# Altium PCB Voltage Controller.PcbDoc
Units mm, origin at the board's own origin, x right, y up, seen from the top; angles counter-clockwise.
Board outline 45 x 50 mm, 2 copper layers (Top Layer, Bottom Layer), stack 0.98 mm thick; 19 components, 11 nets, 42 pads, 0 vias.
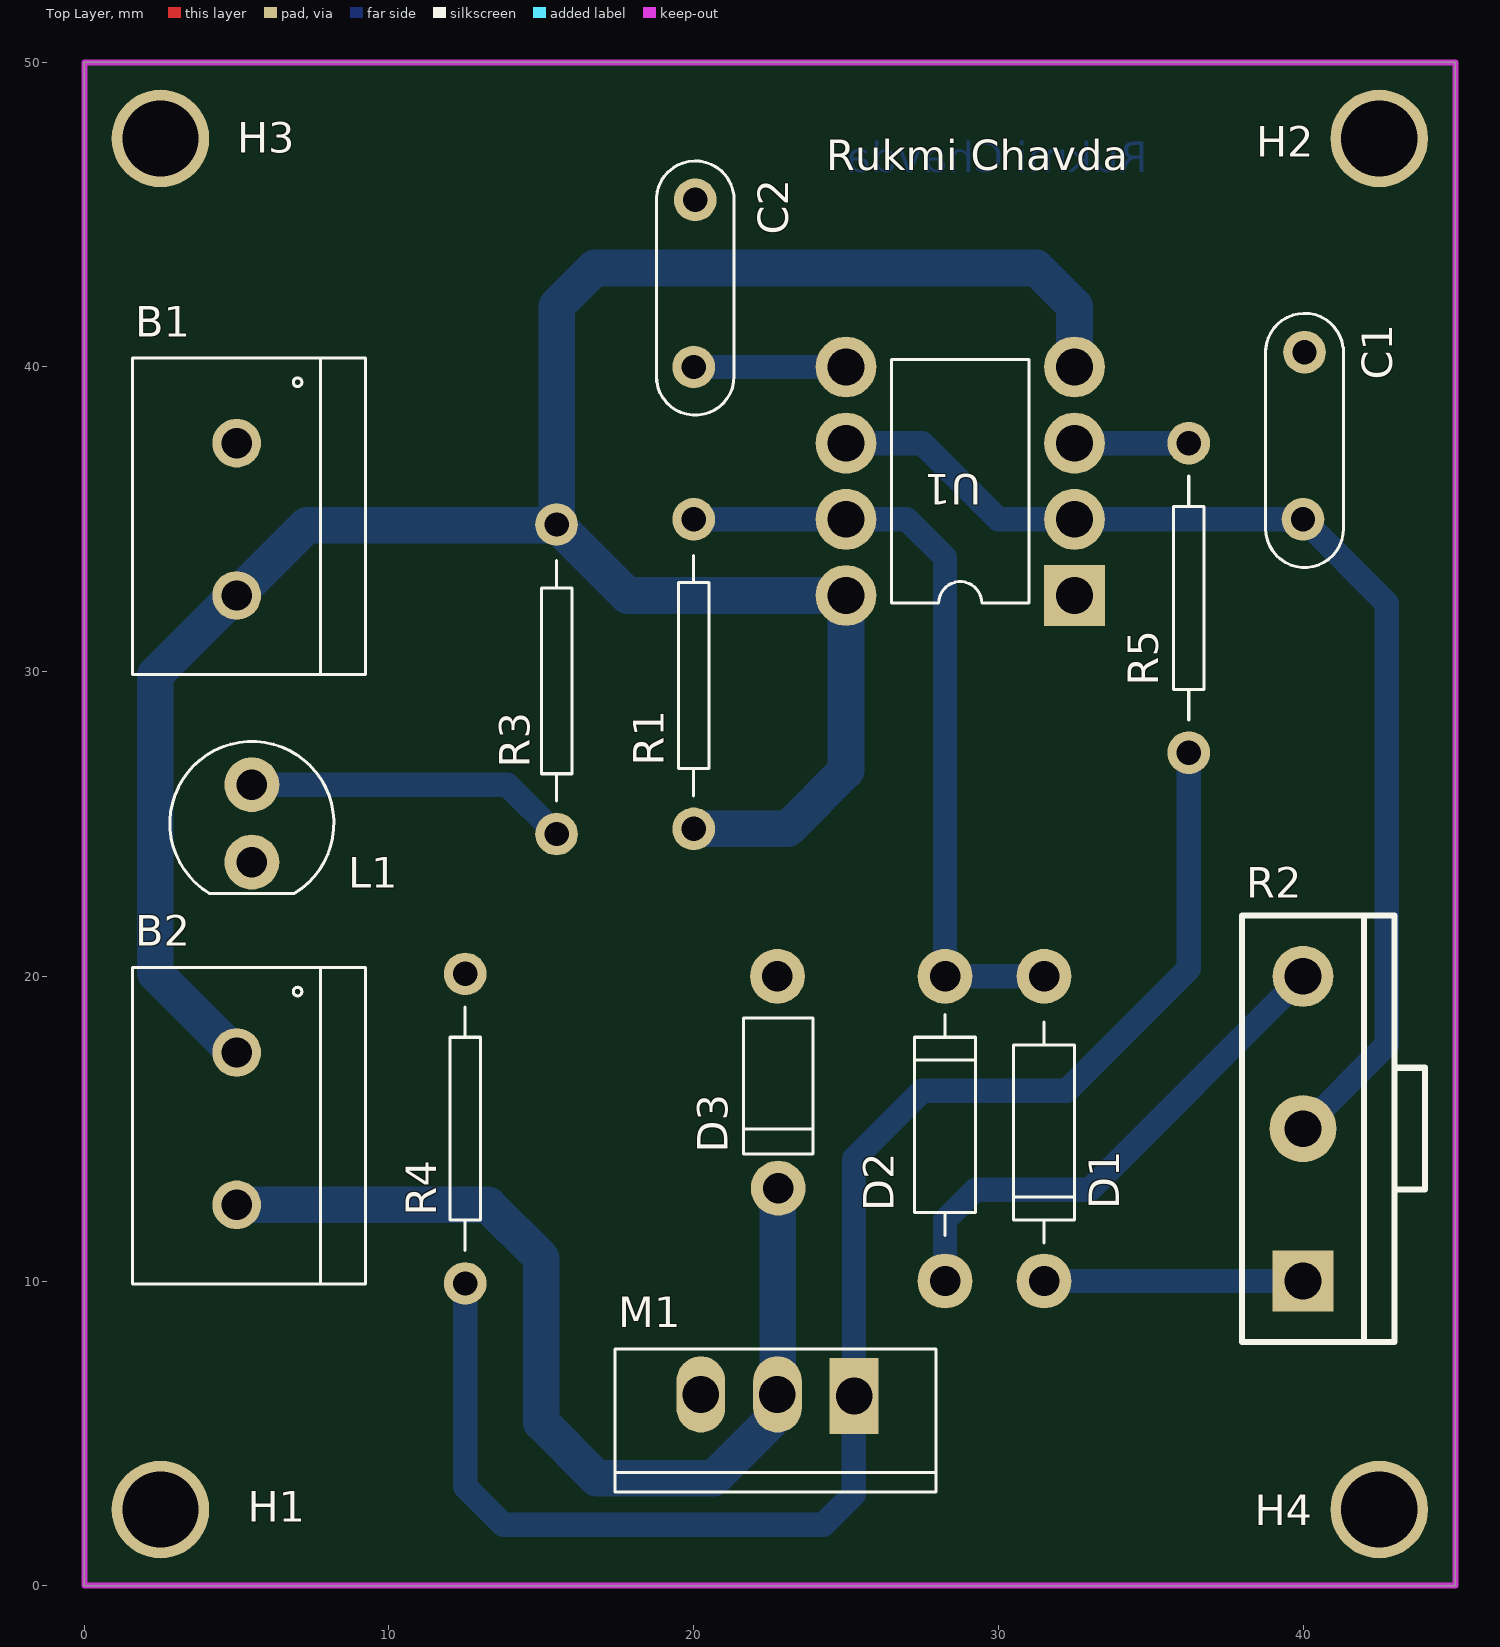
[diagram p0: Top Layer view]
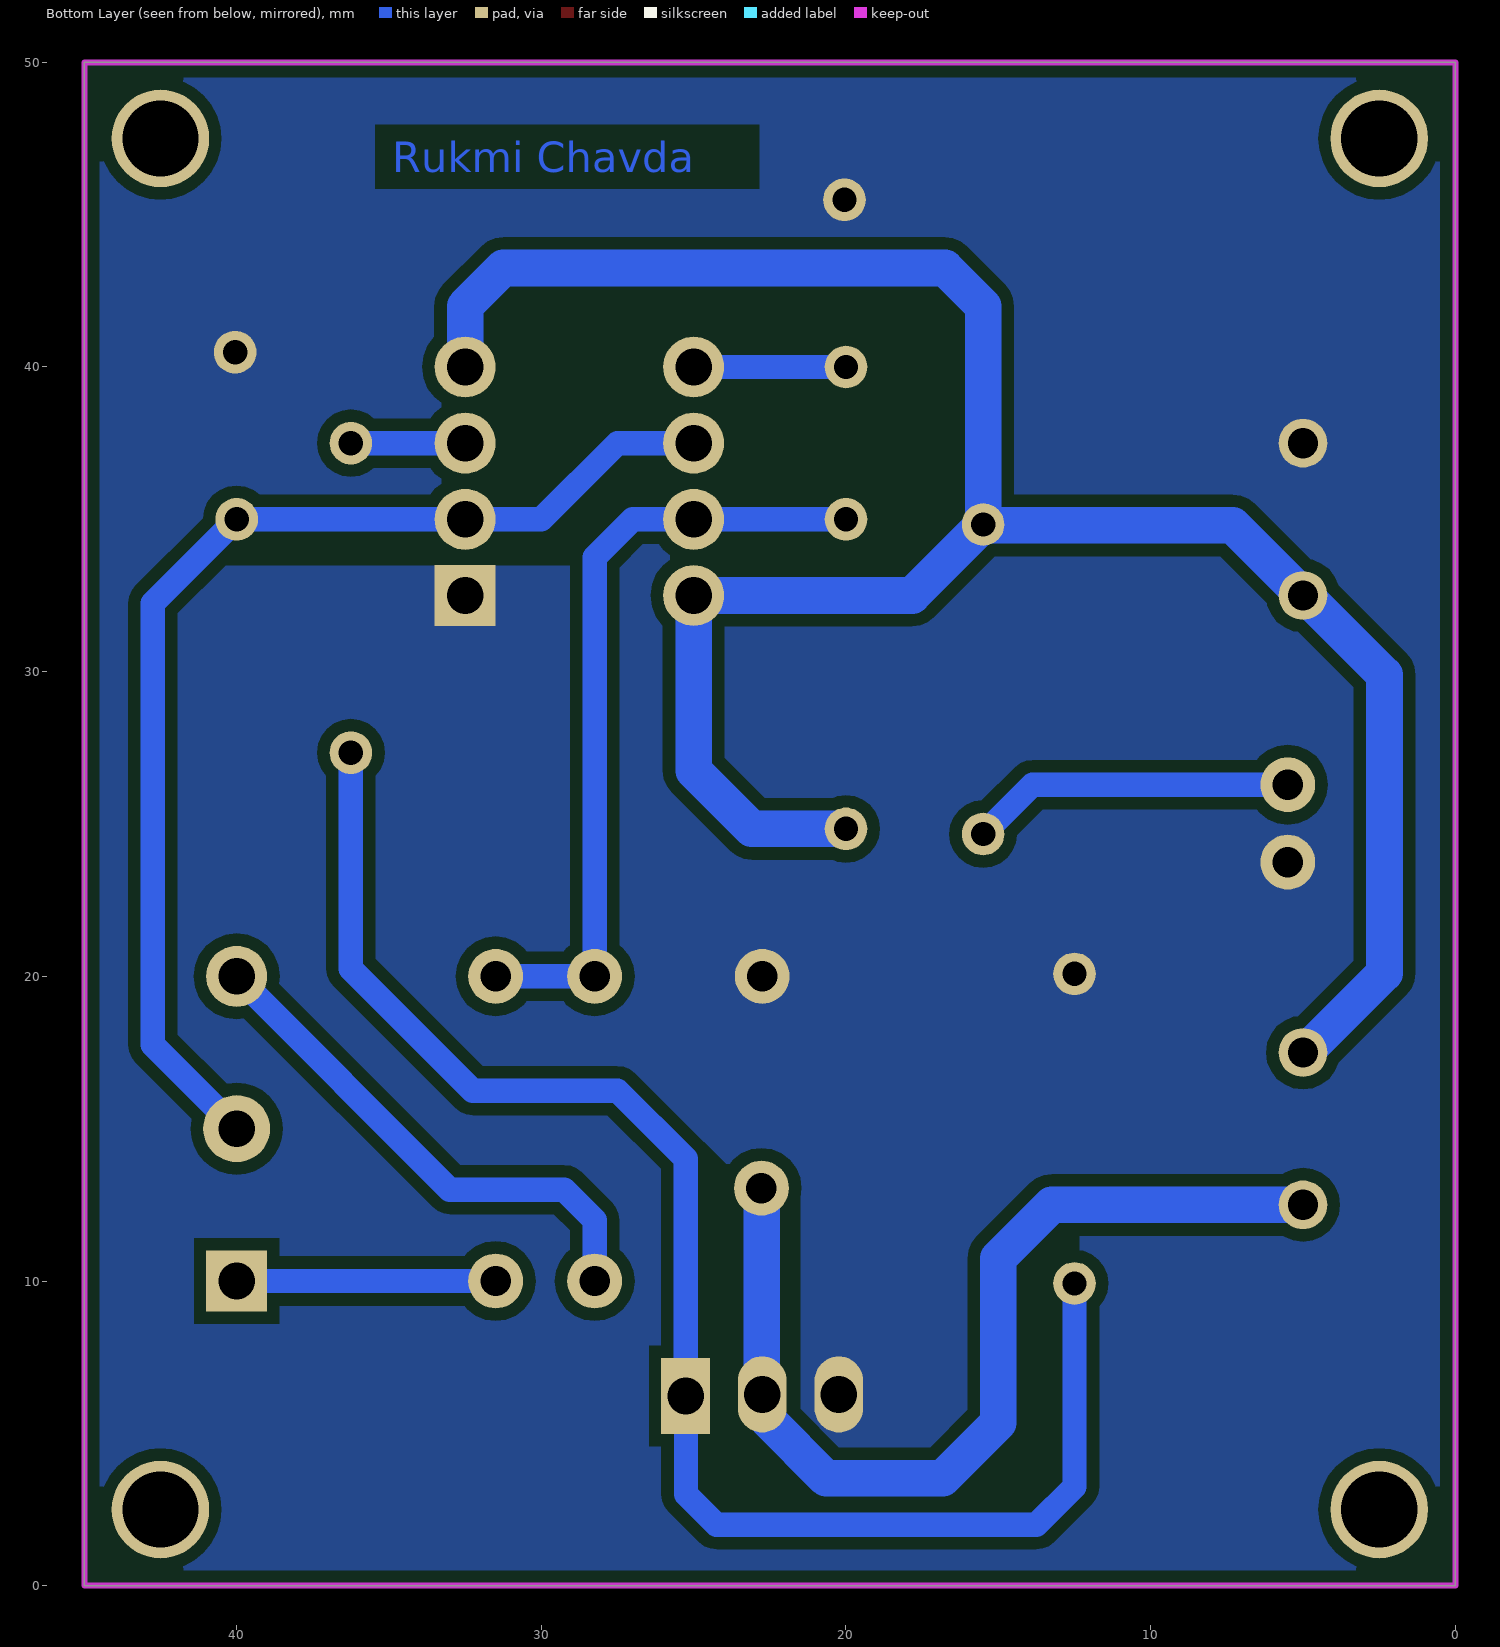
[diagram p1: Bottom Layer view, seen from below]
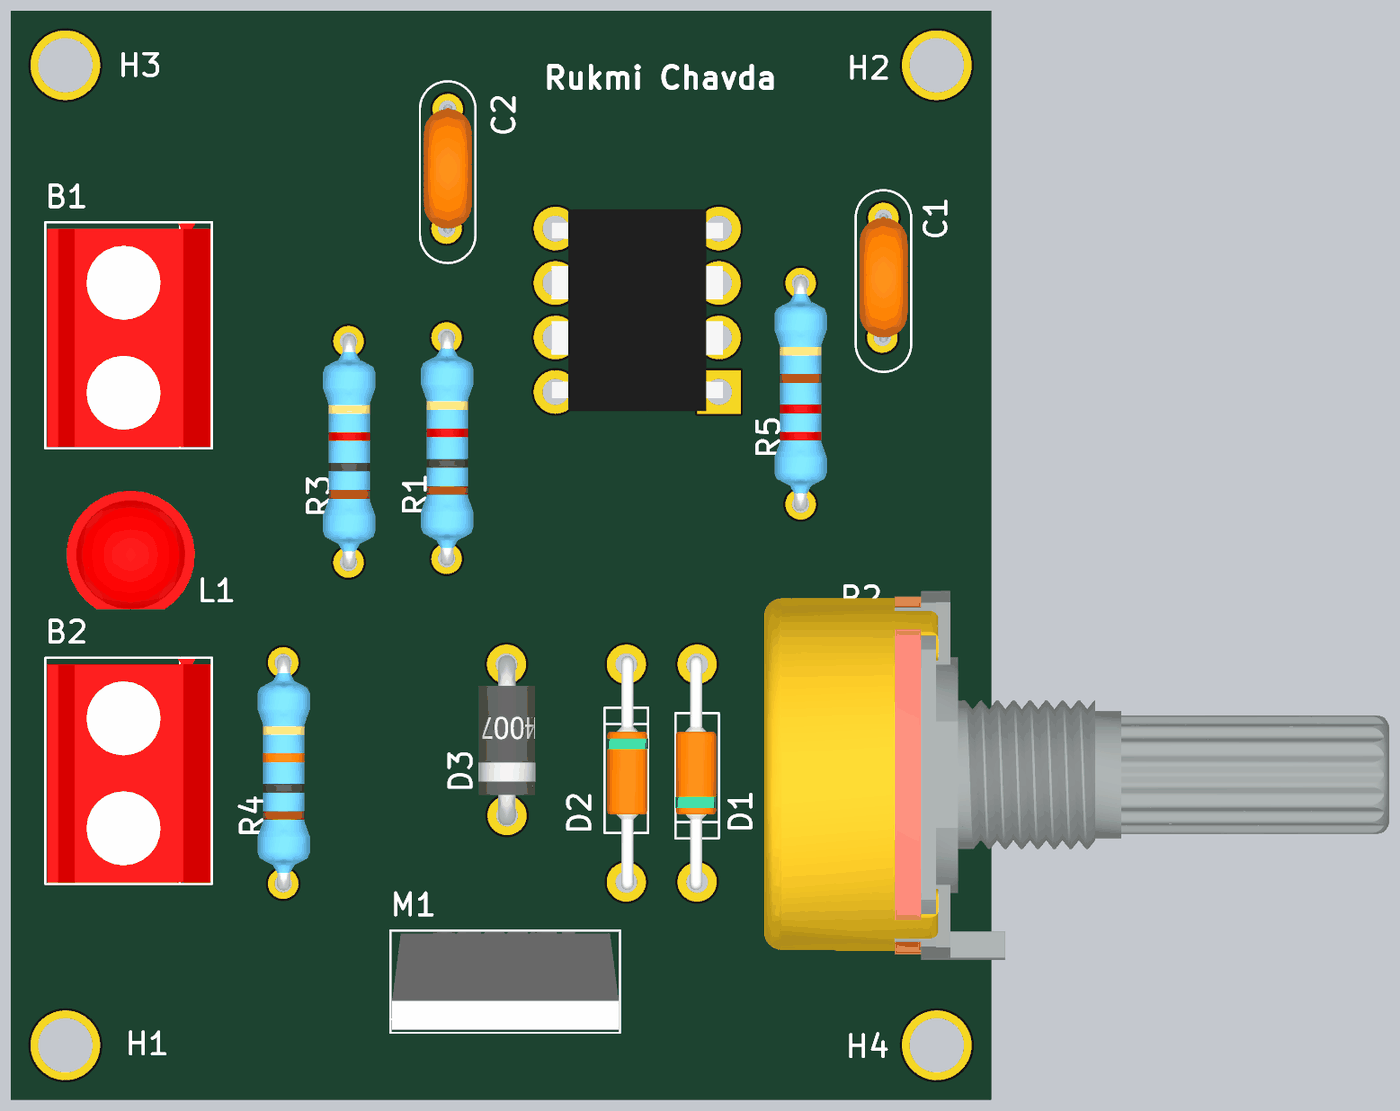
[diagram p2: 3D render of the assembled board from above, using the file's embedded part models]

## Layer stack, top to bottom
Top Solder: solder mask 0.0102, Solder Resist, Dk 3.5
Top Layer: signal copper 0.0356
Dielectric 1: dielectric 0.9086, FR-4, Dk 4.8
Bottom Layer: signal copper 0.0356
Bottom Solder: solder mask 0.0102, Solder Resist, Dk 3.5

## Board outline
0,0 45,0 45,50 0,50

## Design rules (kind name [scope] priority, off if disabled: settings)
Clearance [All] p1: gap=0.4 ignorepadtopadclearanceinfootprint=TRUE
HoleSize [All] p1: absolutevalues=TRUE maxlimit=4 minlimit=0.025 maxpercent=80.000 minpercent=20.000
MinimumSolderMaskSliver [All] p1: minsoldermaskwidth=0.01
PolygonConnect [All] p1: connectstyle=Direct reliefconductorwidth=0.254 reliefentries=4 polygonreliefangle="90 Angle" airgapwidth=0.254
RoutingVias [All] p1: holewidth=0.711 width=1.27 viastyle="Through Hole" minholewidth=0.711 minwidth=1.27 maxholewidth=0.711 maxwidth=1.27
SilkToSilkClearance [All] p1: silktosilkclearance=0.01
SilkToSolderMaskClearance [IsPad] p1: minsilkscreentomaskgap=0.01 clearancetoexposedcopper=TRUE
SolderMaskExpansion [All] p1: expansion=0.102 istentingtop=FALSE
UnRoutedNet [All] p1: checkbadconnections=TRUE
Width [All] p1: maxlimit=1.5 minlimit=0.1 preferedwidth=0.8
25 further rules are at their usual default settings.

## Components (designator, comment, footprint, x,y, rotation, side; value= is the part's Value field where it differs from the comment)
B1 "Ternimal_Block_2_Pin" Ternimal_Block_2_Pin 5,37.5 r270 top
B2 "Ternimal_Block_2_Pin" Ternimal_Block_2_Pin 5,17.5 r270 top
C1 "1nF" Cap_5.5mm_Cerimic 40.025,37.743 r90 top
C2 "100nF" Cap_5.5mm_Cerimic 20.025,42.743 r90 top
D1 "Diode_THT_1N4148TR" Diode_THT_1N4148TR 31.5,20 r270 top
D2 "Diode_THT_1N4148TR" Diode_THT_1N4148TR 28.25,10 r90 top
D3 "Diode_THT_1N4007" Diode_1N4007 22.775,15.55 r270 top
H1 "Hole_M3_2.5MM" "M3 Hole" 2.5,2.5 r0 top
H2 "Hole_M3_2.5MM" "M3 Hole" 42.5,47.5 r0 top
H3 "Hole_M3_2.5MM" "M3 Hole" 2.5,47.5 r0 top
H4 "Hole_M3_2.5MM" "M3 Hole" 42.5,2.5 r0 top
L1 "LED_THT_Red" LED_THT_Red 5.5,25.02 r270 top
M1 "IRF540" irf540 22.75,6.25 r270 top
R1 "Res_THT_1K" Res_THT_1K 20,29.92 r90 top
R2 "10K" Potentiometer_2 40,10 r180 top
R3 "Res_THT_1K" Res_THT_1K 15.5,29.75 r90 top
R4 "Res_THT_10K" Res_THT_10K 12.5,15 r90 top
R5 "Res_THT_220R" Res_THT_220R 36.25,32.42 r90 top
U1 "NE555P" NE555 32.5,32.5 r180 top

## Footprints (in the part's own frame and the unit in brackets; to place one, negate y for a bottom-side part, rotate by r counter-clockwise, add the part's x,y. Pads: shape width x height; smd on the part's side, far side on the other; paste and mask are expansions set on the pad)
Cap_5.5mm_Cerimic [mm]
  round 1.4 hole 0.8: 1(-2.743,0.025) 2(2.743,-0.025)
  silkscreen extent -4.32,-1.3 4.02,1.25, body extent -2.95,-1.13 2.95,1.07, height 7.21
Diode_1N4007 [mm]
  round 1.8 hole 1: A(-4.45,-0.025) K(2.5,0)
  silkscreen extent -3.08,-1.14 1.38,1.14, body extent -4.85,-1.32 2.95,1.3, height 3.31
Diode_THT_1N4148TR [mm]
  round 1.8 hole 1: A(0,0) K(10,0)
  silkscreen extent 1.5,-1 8.75,1, body extent -0.36,-1 10.36,0.9, height 2.15
irf540 [mm]
  oval 2.5x1.6 hole 1.2: D(-0.025,0) S(-0.025,-2.515)
  rect 2.5x1.6 hole 1.2: G(0.025,2.515)
  silkscreen extent -1.52,-5.33 3.18,5.21, body extent -1.44,-5.26 3.02,5.16, height 18.6
LED_THT_Red [mm]
  round 1.8 hole 1: A(-1.27,0) K(1.27,0)
  silkscreen extent -2.69,-2.69 2.3,2.69, body extent -2.95,-2.94 2.5,2.95, height 8.71
"M3 Hole" [mm]
  round 3.2 hole 2.5: 1(0,0)
NE555 [mm]
  rect 2x2 hole 1.2: 1(0,0)
  round 2 hole 1.2: 2(0,-2.5) 3(0,-5) 4(0,-7.5) 5(7.5,-7.5) 6(7.5,-5) 7(7.5,-2.5) 8(7.5,0)
  silkscreen extent 1.5,-7.75 6,0.25, body extent -0.18,-8.38 7.69,0.89, height 5.3
Potentiometer_2 [mm]
  rect 2x2 hole 1.2: 1(0,0)
  round 2 hole 1.2: 2(0,-10)
  round 2.2 hole 1.2: 3(0,-5)
  silkscreen extent -4,-12 2,2, body extent -23.27,-13.42 5.43,3.58, height 21.25
Res_THT_1K [mm]
  round 1.4 hole 0.8: 1(-5.08,0) 2(5.08,0)
  silkscreen extent -4,-0.5 3.9,0.5, body extent -5.38,-1.23 5.38,1.17, height 2.41
Res_THT_10K [mm]
  round 1.4 hole 0.8: 1(-5.08,0) 2(5.08,0)
  silkscreen extent -4,-0.5 4,0.5, body extent -5.38,-1.23 5.38,1.17, height 2.41
Res_THT_220R [mm]
  round 1.4 hole 0.8: 1(-5.08,0) 2(5.08,0)
  silkscreen extent -4,-0.5 4,0.5, body extent -5.38,-1.2 5.38,1.2, height 2.41
Ternimal_Block_2_Pin [mm]
  round 1.6 hole 1: 1(0,0) 2(5,0)
  silkscreen extent -2.79,-3.42 7.59,4.23, body extent -2.74,-3.33 7.51,4.17, height 10.01

## Part data
B1 B2: "Connector"
C1 C2: library part Cap_THT_5.5mm_Cerimic, "CERAMIC  pich 6mm diameter 5mm"
D1 D2: "ON SEMICONDUCTOR - 1N4148TR - Small Signal Diode, Single, 100 V, 200 mA, 1 V, 4 ns, 1 A RoHS Compliant: Yes", Average Rectified Current=200mA, Manufacturer="ON Semiconductor", Manufacturer Part Number=1N4148TR, Max Reverse Voltage (DC)=100V, Supplier Part Number 1=1N4148FSCT-ND, Category="Rectifier Diodes", ComponentLink1Description=http://www.farnell.com/datasheets/1934602.pdf?src-supplier=Farnell, ComponentLink1URL=http://www.farnell.com/datasheets/1934602.pdf?src-supplier=Farnell, ComponentLink2Description=http://www.farnell.com/datasheets/1934602.pdf?src-supplier=Newark, ComponentLink2URL=http://www.farnell.com/datasheets/1934602.pdf?src-supplier=Newark, ComponentLink3Description=http://www.farnell.com/datasheets/1934602.pdf?src-supplier=Element14, ComponentLink3URL=http://www.farnell.com/datasheets/1934602.pdf?src-supplier=Element14, ComponentLink4Description=https://www.fairchildsemi.com/datasheets/1N/1N914.pdf?src-supplier=Digi-Key, ComponentLink4URL=https://www.fairchildsemi.com/datasheets/1N/1N914.pdf?src-supplier=Digi-Key, Mount="Through Hole", Packaging="Cut Tape", Pricing 1="1=0.10000, 10=0.05400, 100=0.02060, 500=0.01506, 1000=0.01011, 2000=0.01002, 5000=0.00968 (USD)", Reverse Recovery Time=4ns, RoHS=No, Stock 1=174333, Supplier 1=Digi-Key
D3: "Diode 1KV 1A 2-Pin DO-41 T/R", Average Rectified Current=1A, Capacitance=15pF, Forward Voltage=1.1V, Manufacturer 1="ON Semiconductor / Fairchild", Manufacturer Part Number 1=1N4007, Max Forward Surge Current (Ifsm)=30A, Max Operating Temperature=175°C, Max Repetitive Reverse Voltage (Vrrm)=1kV, Min Operating Temperature=-65°C, Package Quantity=1000, Peak Reverse Current=5uA, Power Dissipation=3W, Supplier Part Number 1=1N4007FSCT-ND, Category="Integrated Circuits (ICs)", ComponentLink1Description=https://datasheet.ciiva.com/1239/1n4005-1239313.pdf?src-supplier=Newark, ComponentLink1URL=https://datasheet.ciiva.com/1239/1n4005-1239313.pdf?src-supplier=Newark, ComponentLink2Description=https://datasheet.ciiva.com/927/1n4001-d-927427.pdf?src-supplier=Digi-Key, ComponentLink2URL=https://datasheet.ciiva.com/927/1n4001-d-927427.pdf?src-supplier=Digi-Key, ComponentLink3Description=https://datasheet.ciiva.com/910/1n4001-910361.pdf?src-supplier=Digi-Key, ComponentLink3URL=https://datasheet.ciiva.com/910/1n4001-910361.pdf?src-supplier=Digi-Key, ComponentLink4Description=https://datasheet.ciiva.com/910/1n4001-910362.pdf?src-supplier=Digi-Key, ComponentLink4URL=https://datasheet.ciiva.com/910/1n4001-910362.pdf?src-supplier=Digi-Key, Contact Plating=Tin,Matte, Current Rating=1A, Diameter=2.72mm, Element Configuration=Single, Forward Current=1A, Height=5.2mm, Lead Free="Lead Free", Length=5.2mm, Max Reverse Voltage (DC)=1kV, Max Surge Current=30A, Mount="Through Hole", Number of Pins=2, Output Current=1A, Packaging="Tape and Reel", Peak Non-Repetitive Surge Current=30A, Polarity=Standard, Pricing 1="1=0.18000, 10=0.16800, 100=0.09120, 500=0.05614, 1000=0.03827 (USD)", Radiation Hardening=No, REACH SVHC="No SVHC", Reverse Voltage=1kV, RoHS=Yes, Supplier 1=Digi-Key, Voltage Rating (DC)=1kV, Weight=0.245g, Width=2.72mm
H1 H2 H3 H4: "Mounting hole"
L1: "LED RED CLEAR 5MM OVAL T/H", Case/Package=Radial, Color=Red, Forward Current=20mA, Forward Voltage=2.1V, Manufacturer 1=Cree, Manufacturer Part Number 1=C5SMF-RJF-CT0W0BB1, Max Operating Temperature=95°C, Min Operating Temperature=-40°C, Package Quantity=500, Supplier Part Number 1=C5SMF-RJF-CT0W0BB1-ND, Category=LEDs, ComponentLink1Description=https://datasheet.ciiva.com/29562/c5smfrjfrjegjfgjebjfbje1240-29562716.pdf?src-supplier=Digi-Key, ComponentLink1URL=https://datasheet.ciiva.com/29562/c5smfrjfrjegjfgjebjfbje1240-29562716.pdf?src-supplier=Digi-Key, Dominant Wavelength=621nm, Height=10.95mm, Illumination Color=Red, Lens Color=Red, Lens Style=Elliptical, Lens Transparency=Clear, Luminous Intensity=2640mcd, Mount="Through Hole", Packaging=Bulk, Pricing 1="1=0.14000, 10=0.13200, 100=0.12160, 1000=0.10877, 50000=0.10100 (USD)", RoHS=Yes, Stock 1=17201, Supplier 1=Digi-Key, Test Current=20mA, Viewing Angle=40°
M1: "MOSFET N, 100 V 28 A 150 W TO-220, IRF540PBF, Vishay", Case/Package=TO-220AB, Continuous Drain Current (ID)=28A, Drain to Source Breakdown Voltage=100V, Drain to Source Resistance=77mR, Gate to Source Voltage (Vgs)=20V, Input Capacitance=1.7nF, Manufacturer 1=Vishay, Manufacturer Part Number 1=IRF540PBF, Max Operating Temperature=175°C, Max Power Dissipation=150W, Min Operating Temperature=-55°C, Package Quantity=1000, Supplier Part Number 1=IRF540PBF-ND, Threshold Voltage=4V, Category=MOSFETs, ComponentLink1Description=https://datasheet.ciiva.com/6932/91021-6932497.pdf?src-supplier=Newark, ComponentLink1URL=https://datasheet.ciiva.com/6932/91021-6932497.pdf?src-supplier=Newark, ComponentLink2Description=https://datasheet.ciiva.com/13042/91021-106567-13042674.pdf?src-supplier=Mouser, ComponentLink2URL=https://datasheet.ciiva.com/13042/91021-106567-13042674.pdf?src-supplier=Mouser, ComponentLink3Description=https://datasheet.ciiva.com/16978/0900766b80e6df42-16978663.pdf?src-supplier=Allied+Electronics, ComponentLink3URL=https://datasheet.ciiva.com/16978/0900766b80e6df42-16978663.pdf?src-supplier=Allied+Electronics, ComponentLink4Description=https://datasheet.ciiva.com/15137/getdatasheetpartid-93465-15137768.pdf?src-supplier=Verical, ComponentLink4URL=https://datasheet.ciiva.com/15137/getdatasheetpartid-93465-15137768.pdf?src-supplier=Verical, ComponentLink5Description=https://datasheet.ciiva.com/14110/coirf540-data-en-14110684.pdf?src-supplier=Distrelec, ComponentLink5URL=https://datasheet.ciiva.com/14110/coirf540-data-en-14110684.pdf?src-supplier=Distrelec, ComponentLink6Description=https://datasheet.ciiva.com/26791/irf540pbf-26791165.pdf?src-supplier=IIIC, ComponentLink6URL=https://datasheet.ciiva.com/26791/irf540pbf-26791165.pdf?src-supplier=IIIC, ComponentLink7Description=https://datasheet.ciiva.com/18432/70078851-18432471.pdf?src-supplier=Allied+Electronics, ComponentLink7URL=https://datasheet.ciiva.com/18432/70078851-18432471.pdf?src-supplier=Allied+Electronics, ComponentLink8Description=https://datasheet.ciiva.com/16210/91021-16210234.pdf?src-supplier=Future+Electronics, ComponentLink8URL=https://datasheet.ciiva.com/16210/91021-16210234.pdf?src-supplier=Future+Electronics, ComponentLink9Description=https://datasheet.ciiva.com/26146/91021-26146794.pdf?src-supplier=Avnet+Europe, ComponentLink9URL=https://datasheet.ciiva.com/26146/91021-26146794.pdf?src-supplier=Avnet+Europe, Current=28A, Current Rating=28A, Drain to Source Voltage (Vdss)=100V, Element Configuration=Single, Fall Time=43ns, Height=9.01mm, Lead Free="Lead Free", Length=10.51mm, Mount="Through Hole", Nominal Vgs=4V, Number of Channels=1, Number of Elements=1, Number of Pins=3, On-State Resistance=77mR, Packaging=Rail/Tube, Power Dissipation=150W, Pricing 1="1=1.61000, 10=1.44600, 25=1.36400, 100=1.06390, 250=1.03664, 500=0.90024, 1000=0.76384, 2500=0.75293, 5000=0.69837 (USD)", Radiation Hardening=No, Rds On Max=77mR, REACH SVHC=Unknown, Recovery Time=360ns, Rise Time=44ns, RoHS=Yes, Stock 1=4767, Supplier 1=Digi-Key, Turn-Off Delay Time=53ns, Turn-On Delay Time=11ns, Voltage=100V, Voltage Rating (DC)=100V, Weight=0.211644oz, Width=4.7mm
R1 R3: "Res Carbon Film 1K Ohm 5% 0.25W(1/4W) -400ppm/? to 0ppm/? Conformal Coated AXL T/R", Case/Package=Conformal, Manufacturer 1="Stackpole Electronics", Manufacturer Part Number 1=CF14JT1K00, Max Operating Temperature=155°C, Max Power Dissipation=250mW, Min Operating Temperature=-55°C, Package Quantity=1, Resistance=1kR, Supplier Part Number 1=CF14JT1K00CT-ND, Temperature Coefficient=-400ppm/°C, Tolerance=5%, Category="Through-Hole Resistors", ComponentLink1Description=http://www.seielect.com/Catalog/SEI-CF_CFM.pdf?src-supplier=Future+Electronics, ComponentLink1URL=http://www.seielect.com/Catalog/SEI-CF_CFM.pdf?src-supplier=Future+Electronics, ComponentLink2Description=https://www.seielect.com/catalog/SEI-CF_CFM.pdf?src-supplier=Avnet, ComponentLink2URL=https://www.seielect.com/catalog/SEI-CF_CFM.pdf?src-supplier=Avnet, ComponentLink3Description=https://www.seielect.com/catalog/SEI-Packaging.pdf?src-supplier=Digi-Key, ComponentLink3URL=https://www.seielect.com/catalog/SEI-Packaging.pdf?src-supplier=Digi-Key, ComponentLink4Description=https://www.seielect.com/Catalog/SEI-CF_CFM.pdf?src-supplier=Digi-Key, ComponentLink4URL=https://www.seielect.com/Catalog/SEI-CF_CFM.pdf?src-supplier=Digi-Key, ComponentLink5Description=http://components.arrow.com/part/dataview/27620077S9848643N1174?src-supplier=Arrow, ComponentLink5URL=http://components.arrow.com/part/dataview/27620077S9848643N1174?src-supplier=Arrow, ComponentLink6Description=https://www.verical.com/server-webapp/html/getDatasheet?partID=360403&src-supplier=Verical, ComponentLink6URL=https://www.verical.com/server-webapp/html/getDatasheet?partID=360403&src-supplier=Verical, Composition="Carbon Film", Contact Plating=Tin,Matte, Diameter=2.3mm, Features="Flame Retardant Coating", Lead Free="Lead Free", Length=6.5mm, Military Standard=Not, Mount="Through Hole,Axial", Number of Terminations=2, Packaging="Tape and Reel", Power Rating=250mW, Pricing 1="1=0.10000, 10=0.04000, 25=0.02880, 50=0.02200, 100=0.01620, 250=0.01236, 500=0.00990, 1000=0.00729 (USD)", Radiation Hardening=No, RoHS=Yes, Stock 1=806014, Supplier 1=Digi-Key, Termination=Axial
R2: library part Potentiometer_THT_2, "Comman for all values"
R4: "RES 10K OHM 1/4W 5% AXIAL", Case/Package=Conformal, Manufacturer 1="Stackpole Electronics", Manufacturer Part Number 1=CF14JT10K0, Max Operating Temperature=155°C, Max Power Dissipation=250mW, Min Operating Temperature=-55°C, Package Quantity=1, Resistance=10kR, Supplier Part Number 1=CF14JT10K0CT-ND, Temperature Coefficient=-500ppm/°C, Tolerance=5%, Category="Through-Hole Resistors", ComponentLink1Description=https://www.verical.com/server-webapp/html/getDatasheet?partID=367360&src-supplier=Verical, ComponentLink1URL=https://www.verical.com/server-webapp/html/getDatasheet?partID=367360&src-supplier=Verical, ComponentLink2Description=https://www.seielect.com/catalog/SEI-CF_CFM.pdf?src-supplier=Avnet, ComponentLink2URL=https://www.seielect.com/catalog/SEI-CF_CFM.pdf?src-supplier=Avnet, ComponentLink3Description=http://www.seielect.com/Catalog/SEI-CF_CFM.pdf?src-supplier=Future+Electronics, ComponentLink3URL=http://www.seielect.com/Catalog/SEI-CF_CFM.pdf?src-supplier=Future+Electronics, ComponentLink4Description=https://www.seielect.com/catalog/SEI-Packaging.pdf?src-supplier=Digi-Key, ComponentLink4URL=https://www.seielect.com/catalog/SEI-Packaging.pdf?src-supplier=Digi-Key, ComponentLink5Description=http://components.arrow.com/part/dataview/27619991S9848636N1174?src-supplier=Arrow, ComponentLink5URL=http://components.arrow.com/part/dataview/27619991S9848636N1174?src-supplier=Arrow, Composition="Carbon Film", Contact Plating=Tin,Matte, Diameter=2.3mm, Features="Flame Retardant Coating", Lead Free="Lead Free", Length=6.5mm, Military Standard=Not, Mount="Through Hole,Axial", Number of Terminations=2, Packaging="Tape and Reel", Power Rating=250mW, Pricing 1="1=0.10000, 10=0.04000, 25=0.02880, 50=0.02200, 100=0.01620, 250=0.01236, 500=0.00990, 1000=0.00729 (USD)", Radiation Hardening=No, RoHS=Yes, Stock 1=746193, Supplier 1=Digi-Key, Termination=Axial
R5: "RES 220 OHM 1/4W 5% AXIAL", Case/Package=Conformal, Manufacturer 1="Stackpole Electronics", Manufacturer Part Number 1=CF14JT220R, Max Operating Temperature=155°C, Max Power Dissipation=250mW, Min Operating Temperature=-55°C, Package Quantity=1, Resistance=220R, Supplier Part Number 1=CF14JT220RCT-ND, Temperature Coefficient=-400ppm/°C, Tolerance=5%, Category="Through-Hole Resistors", ComponentLink1Description=https://www.seielect.com/catalog/SEI-Packaging.pdf?src-supplier=Digi-Key, ComponentLink1URL=https://www.seielect.com/catalog/SEI-Packaging.pdf?src-supplier=Digi-Key, ComponentLink2Description=http://components.arrow.com/part/dataview/44988614S316465N1174?src-supplier=Arrow, ComponentLink2URL=http://components.arrow.com/part/dataview/44988614S316465N1174?src-supplier=Arrow, ComponentLink3Description=https://www.seielect.com/catalog/SEI-CF_CFM.pdf?src-supplier=Avnet, ComponentLink3URL=https://www.seielect.com/catalog/SEI-CF_CFM.pdf?src-supplier=Avnet, ComponentLink4Description=https://www.verical.com/server-webapp/html/getDatasheet?partID=375100&src-supplier=Verical, ComponentLink4URL=https://www.verical.com/server-webapp/html/getDatasheet?partID=375100&src-supplier=Verical, Composition="Carbon Film", Contact Plating=Tin,Matte, Diameter=2.3mm, Features="Flame Retardant Coating", Lead Free="Lead Free", Length=6.5mm, Military Standard=Not, Mount="Through Hole,Axial", Number of Terminations=2, Packaging="Tape and Reel", Power Rating=250mW, Pricing 1="1=0.10000, 10=0.04000, 25=0.02880, 50=0.02200, 100=0.01620, 250=0.01236, 500=0.00990, 1000=0.00729 (USD)", Radiation Hardening=No, RoHS=Yes, Stock 1=57669, Supplier 1=Digi-Key, Termination=Axial
U1: "Standard Timer Single 8-Pin PDIP Tube", Case/Package=PDIP, Current Rating=10mA, Frequency=500kHz, High Level Output Current=-200mA, Low Level Output Current=200mA, Manufacturer="Texas Instruments", Max Operating Temperature=70°C, Max Supply Voltage=16V, Min Operating Temperature=0°C, Min Supply Voltage=4.5V, Nominal Supply Current=2mA, Operating Supply Voltage=5V, Package Quantity=50, Quiescent Current=15mA, Supplier Part Number 1=296-NE555P-ND, Category="Clock and Timing", ComponentLink1Description=https://datasheet.ciiva.com/1139/sa555-1139904.pdf?src-supplier=Element14, ComponentLink1URL=https://datasheet.ciiva.com/1139/sa555-1139904.pdf?src-supplier=Element14, ComponentLink2Description=https://datasheet.ciiva.com/19457/904085-19457361.pdf?src-supplier=Jameco, ComponentLink2URL=https://datasheet.ciiva.com/19457/904085-19457361.pdf?src-supplier=Jameco, ComponentLink3Description=https://datasheet.ciiva.com/26325/152184-da-01-en-ne555p-timer-tid-26325915.pdf?src-supplier=Conrad, ComponentLink3URL=https://datasheet.ciiva.com/26325/152184-da-01-en-ne555p-timer-tid-26325915.pdf?src-supplier=Conrad, ComponentLink4Description=https://datasheet.ciiva.com/1147/1764032-1147750.pdf?src-supplier=Newark, ComponentLink4URL=https://datasheet.ciiva.com/1147/1764032-1147750.pdf?src-supplier=Newark, ComponentLink5Description=https://datasheet.ciiva.com/14094/ne555-series-eng-tds-14094950.pdf?src-supplier=Distrelec, ComponentLink5URL=https://datasheet.ciiva.com/14094/ne555-series-eng-tds-14094950.pdf?src-supplier=Distrelec, ComponentLink6Description=https://datasheet.ciiva.com/14274/ne555-14274456.pdf?src-supplier=Avnet, ComponentLink6URL=https://datasheet.ciiva.com/14274/ne555-14274456.pdf?src-supplier=Avnet, ComponentLink7Description=https://datasheet.ciiva.com/15152/getdatasheetpartid-248510-15152620.pdf?src-supplier=Verical, ComponentLink7URL=https://datasheet.ciiva.com/15152/getdatasheetpartid-248510-15152620.pdf?src-supplier=Verical, ComponentLink8Description=https://datasheet.ciiva.com/26228/ne555-26228892.pdf?src-supplier=Avnet+Europe, ComponentLink8URL=https://datasheet.ciiva.com/26228/ne555-26228892.pdf?src-supplier=Avnet+Europe, Contact Plating=Gold, Height=4.57mm, Lead Free="Lead Free", Length=9.81mm, Manufacturer Part Number=NE555P, Mount="Through Hole", Number of Pins=8, Number of Timers/Counters=1, Operating Supply Current=10mA, Packaging=Rail/Tube, Pricing 1="1=0.45000, 10=0.34200, 25=0.30800, 100=0.21280, 250=0.17920, 500=0.14560, 1000=0.11200, 2500=0.10080, 5000=0.09520 (USD)", Radiation Hardening=No, REACH SVHC="No SVHC", RoHS=Yes, Stock 1=20689, Supplier 1=Digi-Key, Weight=0.015535oz, Width=6.35mm

## Nets (pads, with @x,y where several pads share a name; then routed paths per layer and width w, separated by ;. In a path a pad name is that pad's centre, name@x,y a point inside that pad or via, vN(x,y) a via of type N, cw(c..) or ccw(c..) an arc to the next point about the centre after c; other vN are vias at no path point)
CON: C2.1 U1.5 | length 5
  Bottom Layer w0.8: C2.1 U1.5
DIS: D1.A D2.K R1.2 U1.7 | length 25.8
  Bottom Layer w0.8: R1.2 27,35 28.25,33.75 D2.K D1.A
GND: B1.1 C1.2 C2.2 D3.A L1.K M1.S R4.2 U1.1
GS: C1.1 R2.3 U1.2 U1.6 | length 38.3
  Bottom Layer w0.8: U1.6 27.5,37.5 30,35 C1.1 42.75,32.25 42.75,17.75 R2.3
LOAD: B2.2 D3.K M1.D | length 33.4
  Bottom Layer w1.2: B2.2 13.25,12.5 15,10.75 15,5.35 16.825,3.525 20.65,3.525 22.55,5.425 22.55,5.517 22.75,5.717 M1.D ; M1.D@22.762,5.807 22.762,13.037 D3.K
NetD1_K: D1.K R2.1 | length 8.5
  Bottom Layer w0.8: D1.K R2.1
NetD2_A: D2.A R2.2 | length 17.1
  Bottom Layer w0.8: D2.A 28.25,12 29.25,13 33,13 R2.2
NetL1_A: L1.A R3.1 | length 10.7
  Bottom Layer w0.8: L1.A 13.88,26.29 R3.1
NetM1_G: M1.G R4.1 R5.1 | length 52
  Bottom Layer w0.8: R4.1 12.5,3.25 13.75,2 24.25,2 25.25,3 25.25,6.21 M1.G 25.265,14.015 27.5,16.25 32.25,16.25 36.25,20.25 R5.1
OUT: R5.2 U1.3 | length 3.8
  Bottom Layer w0.8: U1.3 R5.2
VCC: B1.2 B2.1 R1.1 R3.2 U1.4 U1.8 | length 78
  Bottom Layer w1.2: B2.1 4.926,17.5 2.325,20.101 2.325,29.899 4.926,32.5 B1.2 7.3,34.8 15.47,34.8 R3.2 ; R1.1 23.09,24.84 25,26.75 U1.8 17.83,32.5 R3.2 ; U1.4 32.5,42 31.25,43.25 16.75,43.25 15.5,42 R3.2
pads on no net: H1.1 H2.1 H3.1 H4.1

## Polygon pours and split planes (outlines as drawn)
GND on Bottom Layer "GND_L02_P000" (solid, remove dead copper, pour order 0): 5,49.5 0.5,49.5 0.5,45 0.5,5 0.5,0.5 5,0.5 40,0.5 44.5,0.5 44.5,5 44.5,45 44.5,49.5 40,49.5

## Keep-outs
Keep-Out Layer:
  the board outline again, w0.2

## Other copper
Bottom Layer:
  pour cut-out: 12.35,11.55 12.35,10.775 12.775,10.775 12.991,10.991 12.991,11.483
  pour cut-out: 12.832,11.491 12.333,10.992 12.583,10.992 13.275,10.3 13.375,10.2 13.375,9.625 13.325,9.575 13.402,9.498 13.323,9.498 13.075,9.25 13.075,9.175 13.125,9.175 13.35,8.95 14.25,8.95 14.25,10 14.175,10.075 14.175,10.475 14.15,10.475 13.15,11.475
  pour cut-out: 15.575,3.1 15.575,2.6 15.525,2.55 14,2.55 14,2.6 13.075,3.525 13.075,9.175 14.4,9.175 14.425,9.15 14.425,4.275 15.125,3.575 15.125,3.55
  pour cut-out: 21.508,12.711 21.5,12.702 21.5,4.375 22.025,4.9 22.025,12.725
  pour cut-out: 23.7,13.591 23.7,13.475 23.825,13.35 23.825,12.6 23.325,12.1 23.325,10.05 23.45,9.925 24.625,9.925 24.625,14.516
  pour cut-out: 23.5,10.5 24.5,10.5 24.5,6.5 23.5,6.5
  pour cut-out: 32,33.75 32,33.5 33,33.5 33,33.75
  pour cut-out: 33,34 33,33.5 40.5,33.5 39.5,34.5 33.5,34.5
  pour cut-out: 26,37 25.5,36.5 25.5,36 26,35.5 27,35.5 29,33.5 32,33.5 32,34 31.5,34.5 30,34.5 27.5,37
  text "Rukmi Chavda" at 34.9,46.4 h1

## Silkscreen, mask and mechanical layers (free items; w line width, h text height)
Top Overlay:
  text "Rukmi Chavda" at 24.35,46.45 h1